# EAGLE board 2nx_interleaved_DANIEL_EDIT_dip2eagle (EAGLE 9.2.2)
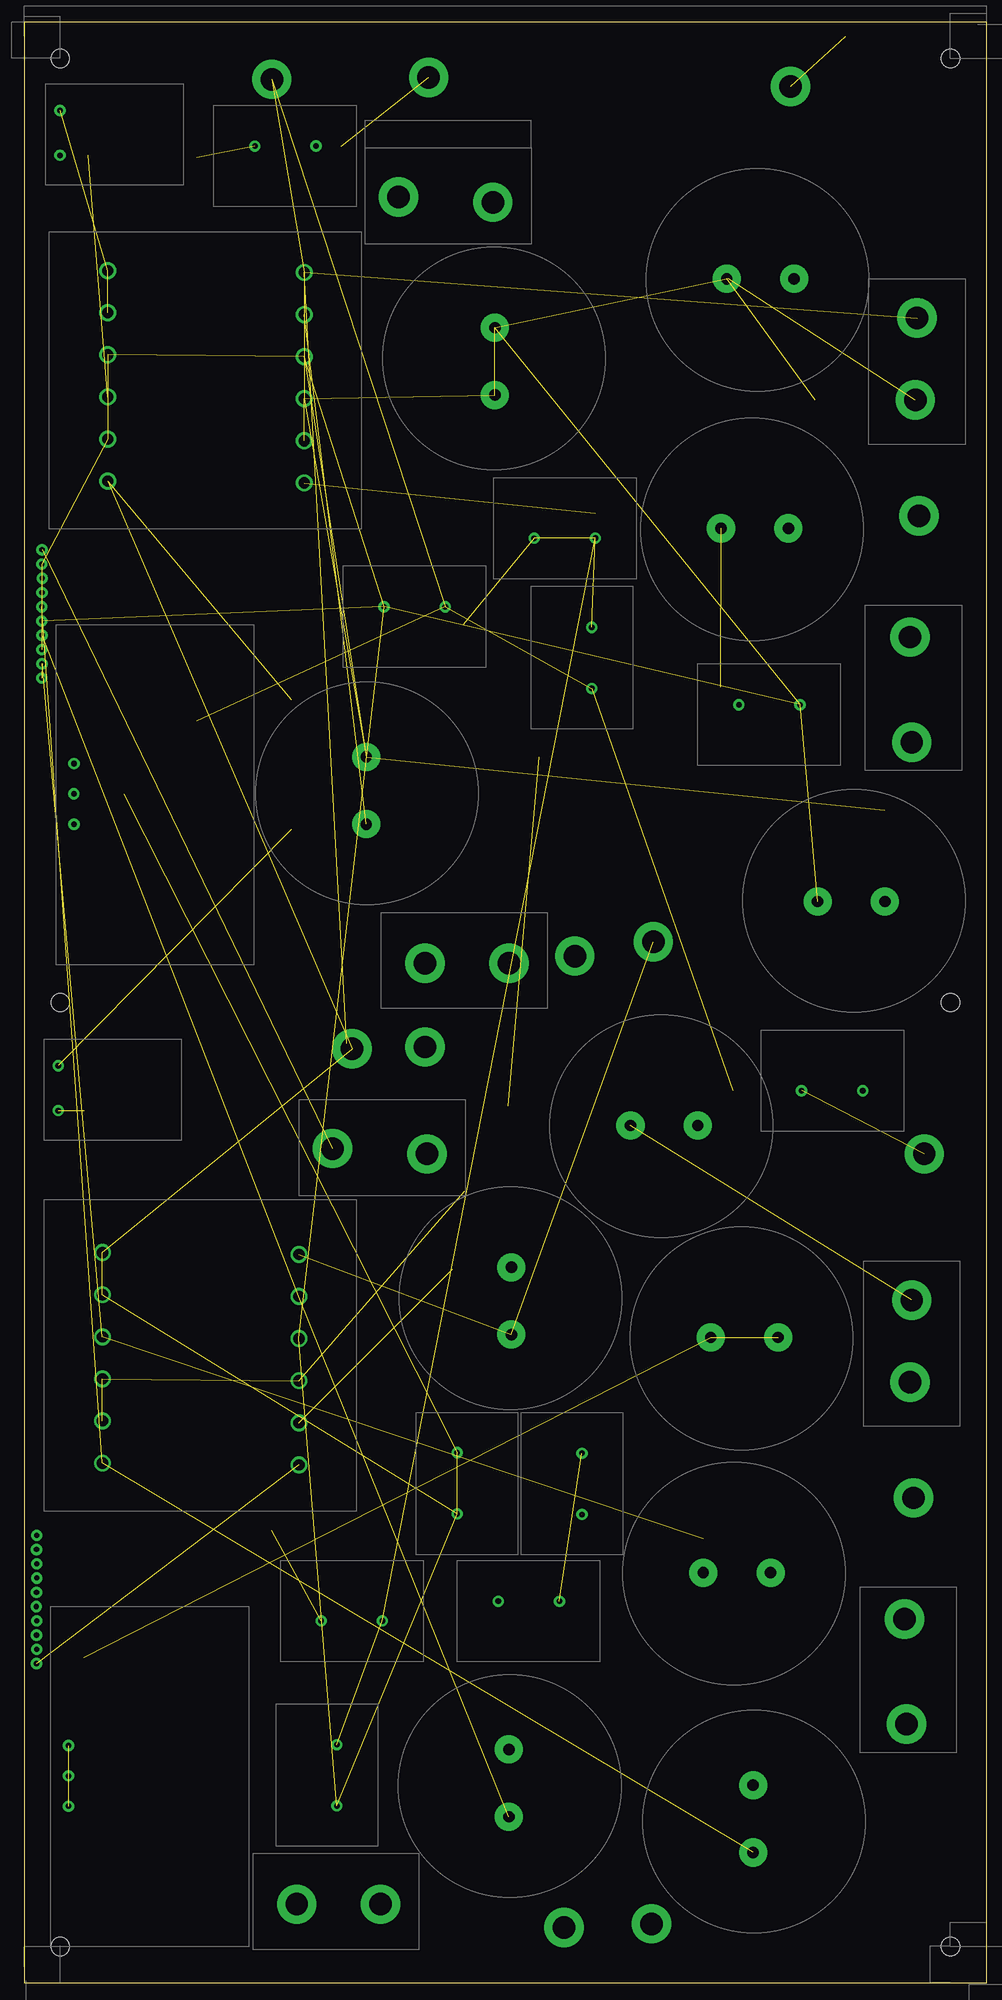
[diagram p0: board, top side]
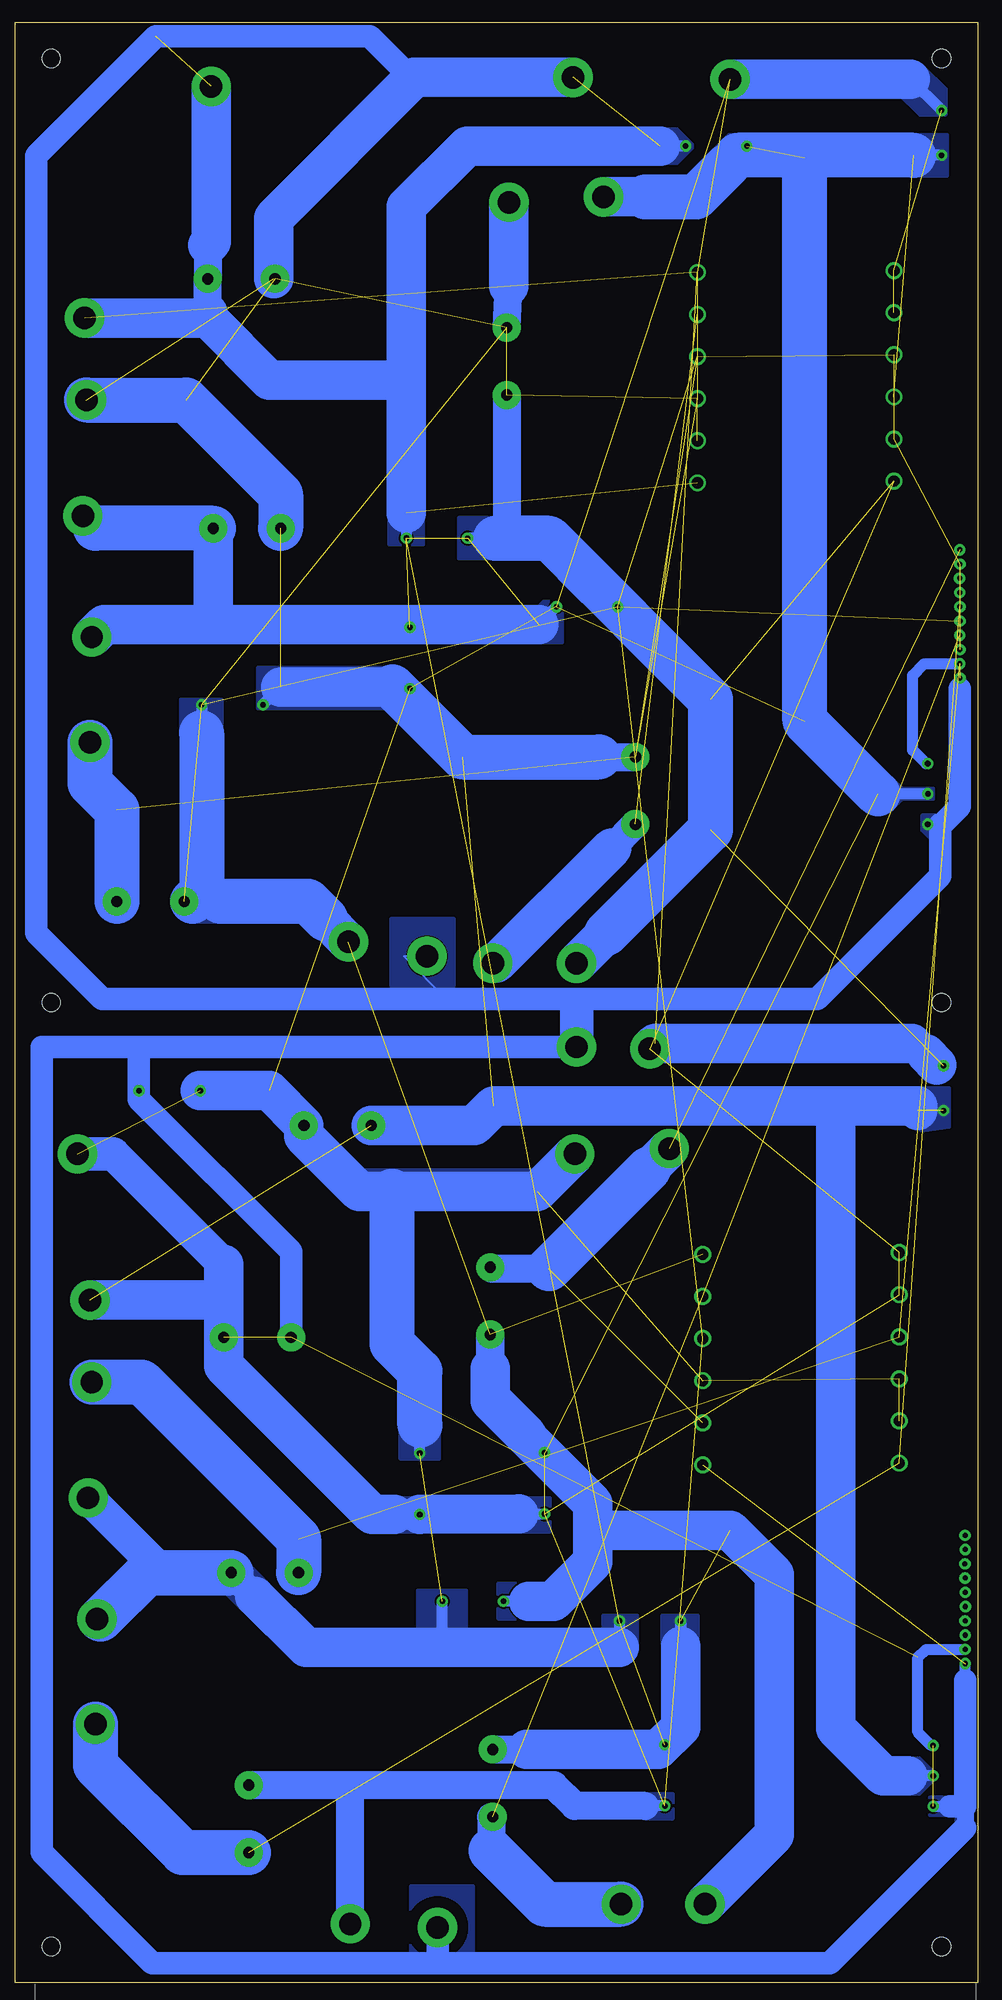
[diagram p1: board, bottom side, seen from below]

Size 171.45 x 349.25 mm. Coordinates in mm from the lower left corner, seen from the top.
Outline: 0,0 171.45,0 171.45,349.25 0,349.25 0,0
Copper layers (1*16): Top 0.035mm / dielectric 1.5mm / Bottom 0.035mm
Design rules "default *": minimum track width 10mil, minimum drill 0.61mm, track to track 8mil, track to pad 8mil, pad to pad 8mil, via to via 8mil, smd to smd 8mil, copper to edge 40mil, drill to drill 8mil, minimum pad ring 0mil, minimum via ring 8mil, stop-mask expansion 4mil, vias tented up to drill 20mil, thermal gap 10mil
Net classes: 0 Default: width 0.3 mm, drill 0.3 mm, clearance 0.203 mm
Holes 3.3 mm at 165,342.8 6.45,342.8 165,6.45 6.45,6.45 165,174.62 6.45,174.62

## Footprints (pad centres in the part's own frame; a part is rotated, then mirrored left to right if it is on the bottom)
PAD = drill 4 pad 7: 1 0,0
PAD1 = drill 1 pad 2: 1 0,0
PAD_PAD2 = drill 2 pad 3: 1 0,0
PAD_PAD14 = drill 2 pad 5: 1 0,0
PAD_PAD29 = drill 0.9 pad 2: 1 0,0
P116 = drill 1 pad 2: 1 0,0.005; 1_1 -5.398,-0.005; 1_2 5.398,-0.005
P117 = drill 1 pad 2: 1 0,0.005; 1_1 -5.398,-0.005; 1_2 5.398,-0.005
P118 = drill 1 pad 2: 1 5.45,2.765; 1_1 -5.45,2.763
P119 = drill 1 pad 2: 1 5.45,2.765; 1_1 -5.45,2.763

## Placement (x,y rotation side)
PAD1  [PAD]  72.07,339.41 270 bottom
PAD2  [PAD1]  101.76,257.33 180 top
PAD3  [PAD1]  90.86,257.33 180 top
PAD4  [PAD_PAD2]  14.92,305 0 bottom
PAD5  [PAD1]  6.42,325.54 90 top
PAD6  [PAD_PAD2]  14.92,297.5 0 bottom
PAD7  [PAD1]  6.42,333.54 90 top
PAD8  [PAD_PAD2]  14.92,290 0 bottom
PAD9  [PAD1]  101.12,241.46 270 top
PAD10  [PAD_PAD2]  14.92,282.5 0 bottom
PAD11  [PAD1]  101.13,230.56 270 top
PAD12  [PAD_PAD2]  14.92,275 0 bottom
PAD13  [PAD1]  127.32,227.65 0 top
PAD14  [PAD_PAD2]  14.92,267.5 0 bottom
PAD15  [PAD1]  138.22,227.65 0 top
PAD16  [PAD_PAD2]  49.92,304.68 0 bottom
PAD17  [PAD_PAD2]  49.92,297.18 0 bottom
PAD18  [PAD1]  64.14,245.11 0 top
PAD19  [PAD_PAD2]  49.92,289.68 0 bottom
PAD20  [PAD1]  75.03,245.11 0 top
PAD21  [PAD_PAD2]  49.92,282.18 0 bottom
PAD22  [PAD1]  63.82,64.45 180 top
PAD23  [PAD_PAD2]  49.92,274.68 0 bottom
PAD24  [PAD1]  55.72,42.39 270 top
PAD25  [PAD_PAD2]  49.92,267.18 0 bottom
PAD26  [PAD1]  6.11,155.36 90 top
PAD27  [PAD_PAD14]  83.87,282.84 180 bottom
PAD28  [PAD1]  77.15,83.5 90 top
PAD29  [PAD_PAD14]  83.87,294.84 180 bottom
PAD30  [PAD1]  77.15,94.4 90 top
PAD31  [PAD_PAD14]  60.96,218.38 0 bottom
PAD32  [PAD1]  6.11,163.36 90 top
PAD33  [PAD_PAD14]  60.96,206.38 0 bottom
PAD34  [PAD1]  52.92,64.45 180 top
PAD35  [PAD_PAD14]  141.34,192.61 270 bottom
PAD36  [PAD1]  55.72,31.49 270 top
PAD37  [PAD_PAD14]  153.34,192.61 270 bottom
PAD38  [PAD1]  84.45,67.94 0 top
PAD39  [PAD_PAD14]  136.14,259.08 90 bottom
PAD40  [PAD1]  95.36,67.95 0 top
PAD41  [PAD_PAD14]  124.14,259.08 90 bottom
PAD42  [PAD1]  149.38,158.91 180 top
PAD43  [PAD_PAD14]  137.16,303.53 90 bottom
PAD44  [PAD1]  138.48,158.91 180 top
PAD45  [PAD_PAD14]  125.16,303.53 90 bottom
PAD46  [PAD]  136.53,337.82 270 bottom
PAD47  [PAD]  159.07,296.55 270 bottom
PAD48  [PAD]  158.75,281.94 270 bottom
PAD49  [PAD]  98.11,182.88 270 bottom
PAD50  [PAD]  159.38,261.3 270 bottom
PAD51  [PAD_PAD29]  3.17,232.41 180 bottom
PAD52  [PAD]  157.8,239.71 270 bottom
PAD53  [PAD]  158.12,220.98 270 bottom
PAD54  [PAD]  71.44,181.61 270 bottom
PAD55  [PAD]  86.36,181.61 270 bottom
PAD56  [PAD]  112.08,185.42 270 bottom
PAD57  [PAD]  83.5,317.18 270 bottom
PAD58  [PAD]  66.67,318.13 270 bottom
PAD59  [PAD_PAD29]  3.21,247.65 180 bottom
PAD60  [PAD_PAD29]  3.23,250.19 180 bottom
PAD61  [PAD_PAD29]  3.17,252.73 180 bottom
PAD62  [PAD_PAD29]  3.21,255.27 180 bottom
PAD63  [PAD_PAD29]  3.17,237.49 180 bottom
PAD64  [PAD_PAD29]  3.21,240.03 180 bottom
PAD65  [PAD_PAD29]  3.15,242.57 180 bottom
PAD66  [PAD_PAD29]  3.17,245.11 180 bottom
PAD67  [PAD]  44.13,339.09 270 bottom
PAD68  [PAD_PAD29]  3.21,234.95 180 bottom
PAD69  [PAD]  58.42,166.37 270 bottom
PAD70  [PAD]  71.44,166.69 270 bottom
PAD71  [PAD_PAD2]  13.97,130.06 0 bottom
PAD72  [PAD_PAD2]  13.97,122.56 0 bottom
PAD73  [PAD_PAD2]  13.97,115.06 0 bottom
PAD74  [PAD_PAD2]  13.97,107.56 0 bottom
PAD75  [PAD_PAD2]  13.97,100.06 0 bottom
PAD76  [PAD_PAD2]  13.97,92.56 0 bottom
PAD77  [PAD_PAD2]  48.97,129.74 0 bottom
PAD78  [PAD_PAD2]  48.97,122.24 0 bottom
PAD79  [PAD_PAD2]  48.97,114.74 0 bottom
PAD80  [PAD_PAD2]  48.97,107.24 0 bottom
PAD81  [PAD_PAD2]  48.97,99.74 0 bottom
PAD82  [PAD_PAD2]  48.97,92.24 0 bottom
PAD83  [PAD_PAD14]  86.81,115.44 180 bottom
PAD84  [PAD_PAD14]  86.81,127.44 180 bottom
PAD85  [PAD_PAD14]  86.36,41.53 0 bottom
PAD86  [PAD_PAD14]  86.36,29.53 0 bottom
PAD87  [PAD_PAD14]  129.86,35.18 0 bottom
PAD88  [PAD_PAD14]  129.86,23.18 0 bottom
PAD89  [PAD_PAD14]  132.97,73.03 90 bottom
PAD90  [PAD_PAD14]  120.97,73.03 90 bottom
PAD91  [PAD_PAD14]  134.3,114.94 90 bottom
PAD92  [PAD_PAD14]  122.3,114.94 90 bottom
PAD93  [PAD]  160.34,147.64 270 bottom
PAD94  [PAD]  158.12,121.6 270 bottom
PAD95  [PAD]  157.8,107 270 bottom
PAD96  [PAD]  158.43,86.36 270 bottom
PAD97  [PAD]  156.84,64.77 270 bottom
PAD98  [PAD]  157.16,46.04 270 bottom
PAD99  [PAD]  48.58,13.97 270 bottom
PAD100  [PAD]  63.5,13.97 270 bottom
PAD101  [PAD]  111.76,10.48 270 bottom
PAD102  [PAD]  71.75,147.64 270 bottom
PAD103  [PAD]  54.93,148.59 270 bottom
PAD104  [PAD]  96.2,9.84 270 bottom
PAD105  [PAD_PAD29]  2.25,72.07 180 bottom
PAD106  [PAD_PAD29]  2.28,74.61 180 bottom
PAD107  [PAD_PAD29]  2.22,77.15 180 bottom
PAD108  [PAD_PAD29]  2.25,79.69 180 bottom
PAD109  [PAD_PAD29]  2.22,61.91 180 bottom
PAD110  [PAD_PAD29]  2.25,64.45 180 bottom
PAD111  [PAD_PAD29]  2.19,66.99 180 bottom
PAD112  [PAD_PAD29]  2.22,69.53 180 bottom
PAD113  [PAD_PAD29]  2.22,56.83 180 bottom
PAD114  [PAD_PAD29]  2.25,59.37 180 bottom
PAD115  [PAD_PAD14]  120.02,152.72 90 bottom
PAD116  [PAD_PAD14]  108.02,152.72 90 bottom
U1  [P116]  8.88,211.77 90 top
U2  [P117]  7.93,36.83 90 top
U3  [P118]  46.57,324.42 0 top
U4  [P119]  96.61,88.85 270 top

## Library data of the parts
PAD1-PAD116 U1-U4 = common

## Nets
NET_2: PAD2.1 PAD9.1 PAD14.1 PAD32.1
NET_3: PAD1.1 PAD22.1 PAD24.1 PAD25.1 U3.1
NET_5: PAD3.1 PAD5.1 PAD10.1 PAD20.1 PAD28.1 PAD30.1 PAD36.1 U1.1 U3.1_1
NET_6: PAD62.1 PAD81.1
NET_8: PAD17.1 PAD33.1
NET_9: PAD4.1 PAD6.1 PAD7.1 PAD13.1 PAD16.1 PAD21.1 PAD26.1 PAD45.1 PAD94.1 U2.1
NET_10: PAD19.1 PAD31.1
NET_11: PAD15.1 PAD35.1
NET_12: PAD1.1 PAD21.1 PAD23.1 PAD27.1 PAD29.1 PAD46.1 PAD48.1 PAD70.1 PAD82.1 PAD91.1 U1.1_1 U2.1_1
NET_13: PAD16.1 PAD47.1
NET_15: PAD8.1 PAD12.1 PAD15.1 PAD17.1 PAD18.1 PAD19.1 PAD34.1 PAD61.1 PAD63.1 PAD77.1
NET_16: PAD14.1 PAD69.1 PAD71.1 PAD72.1 U4.1
NET_20: PAD18.1 PAD65.1 PAD79.1
NET_21: PAD64.1 PAD78.1
NET_22: PAD68.1 PAD73.1
NET_23: PAD66.1 PAD76.1
NET_24: PAD11.1 PAD20.1 PAD22.1 PAD67.1 PAD74.1 PAD75.1 PAD80.1 PAD93.1 U4.1_1
NET_25: PAD92.1 U2.1_1

## Tracks (layer width: path | path; a pad name or v marks a point on that pad's centre or on a via)
NET_2  (4 unrouted)
  Bottom 2: 64.14,245.11 67.67,248.65 | 90.86,257.33 85.86,257.33 90.86,257.33
  Bottom 5: 83.87,282.84 83.87,257.33
  Bottom 7: 66.13,186.91 71.44,181.61
  Bottom 8: 76.36,257.33 83.87,257.33 85.86,257.33 76.36,257.33 | 76.36,257.33 47.62,228.6 47.62,205.42 66.13,186.91 | 67.67,248.65 76.36,257.33
  pour Bottom (isolate 0.33, no thermals): 86.68,260.99 92.39,260.99 92.39,253.68 85.72,253.68 85.72,260.35 86.11,259.84 86.27,259.73 86.46,259.73 86.62,259.85 86.68,260.03
NET_3  (4 unrouted)
  Bottom 2: U3.1 56.52,327.19 | 101.76,261.83 101.76,257.33
  Bottom 5: 137.16,309.53 137.16,303.53 137.16,297.53
  Bottom 7: 56.52,327.19 90.96,327.19 101.76,316.39 101.76,285.53 | 101.76,285.53 101.76,261.83 | 136.53,337.82 136.53,310.17 137.16,309.53 | 159.07,296.55 137.16,296.55 | 137.16,296.55 137.16,297.53 | 137.16,296.55 126.14,285.53 101.76,285.53
  pour Bottom (isolate 0.33, no thermals): 50.8,327.53 50.8,326.84 51.66,325.98 53.47,324.17 55.56,324.17 55.56,330.2 53.47,330.2
  pour Bottom (isolate 0.33, no thermals): 98.74,261.3 98.74,256.22 104.14,256.22 104.78,256.22 104.78,261.3
NET_5  (7 unrouted)
  Bottom 0.3: 138.75,258.13 137.09,258.13 136.14,259.08 | 157.16,259.08 159.38,261.3
  Bottom 2: PAD20.1 78.22,241.93 | 44.65,323.65 42.76,325.54 U3.1_1 | U3.1_1 | U1.1 17.78,211.77 | PAD5.1 11.43,325.54
  Bottom 7: 78.22,241.93 136.15,241.93 | 136.15,241.93 155.58,241.93 157.8,239.71 | 136.15,241.93 136.14,259.08 | 66.67,318.13 59.17,318.13
  Bottom 8: 136.14,259.08 | 136.14,259.08 157.16,259.08 | 59.17,318.13 50.16,318.13 44.65,323.65 | 17.78,211.77 30.8,224.79 30.8,325.12 | 11.43,325.54 42.76,325.54
  pour Bottom (isolate 0.33, no thermals): 73.98,246.06 77.34,246.06 78.42,244.98 78.42,238.76 73.98,238.76 73.98,243.21
  pour Bottom (isolate 0.33, no thermals): 42.04,321 41.27,321.76 41.27,329.25 43.5,329.25 43.81,329.25 44.13,329.25 44.32,329.25 52.28,321.29
  pour Bottom (isolate 0.33, no thermals): 11.11,321.94 11.11,329.25 5.4,329.25 5.4,321.94
  pour Bottom (isolate 0.33, no thermals): 7.94,212.72 7.94,210.82 13.47,210.82 15.12,209.16 15.56,208.87 15.56,214.82 13.47,212.72
  pour Bottom (isolate 0.33, no thermals): 80.01,71.12 85.41,71.12 85.41,64.77 80.01,64.77
NET_6  (2 unrouted)
  Bottom 5: 76.37,127.15 86.51,127.15 86.81,127.44
  Bottom 7: 54.93,148.59 58.64,144.87
  Bottom 8: 58.64,144.87 76.37,127.15
NET_8  (1 unrouted)
  Bottom 5: PAD33.1 65.2,202.13
  Bottom 7: 65.2,202.13 85.72,181.61 86.36,181.61
NET_9  (10 unrouted)
  Bottom 2: U2.1 12.43,36.83 | PAD13.1 124.14,230.83 | PAD7.1 11.98,339.09
  Bottom 5: 67.46,218.38 60.96,218.38
  Bottom 7: 108.02,152.72 89.7,152.72 86.21,156.21 25.29,156.21 | 25.29,156.21 10.7,156.21 10.7,155.36 | 12.43,36.83 16.83,36.83 25.29,45.29 25.29,156.21 | 124.14,230.83 104.22,230.83 | 11.98,339.09 44.13,339.09
  Bottom 8: 158.75,281.94 140.97,281.94 124.14,265.11 124.14,259.08 | 104.22,230.83 91.76,218.38 67.46,218.38
  pour Bottom (isolate 0.33, no thermals): 10.46,159.38 5.08,159.38 5.08,152.4 10.03,151.76 10.83,152.56
  pour Bottom (isolate 0.33, no thermals): 7.62,37.33 7.62,36.33 10.29,33.66 12.06,33.66 12.06,40.01 10.29,40.01
  pour Bottom (isolate 0.33, no thermals): 104.46,234.31 128.27,234.31 128.27,227.01 104.46,227.01
  pour Bottom (isolate 0.33, no thermals): 5.71,332.74 10.35,332.74 14.16,336.55 9.53,341.18 5.71,337.37
NET_10  (2 unrouted)
  Bottom 8: 158.12,220.98 158.12,213.68 153.34,208.9 153.34,192.61
NET_11  (2 unrouted)
  Bottom 5: 83.87,294.84 83.5,302.19
  Bottom 7: 83.5,302.19 83.5,317.18
NET_12  (9 unrouted)
  Bottom 0.3: 125.16,303.53 125.41,303.53 | U1.1_1 6.67,206.38 6.35,206.38 | 3.17,232.41 3.17,230.5 | 98.11,182.88 102.23,182.88 94.61,175.26 | 71.44,173.24 73.46,175.26 | U2.1_1 | U2.1_1 2.22,31.43
  Bottom 2: 8.89,217.17 9.21,217.17 11.59,219.55 11.59,232.89 9.53,234.95 3.21,234.95 | 2.22,53.83 2.22,56.83 | U2.1_1 4.94,31.43 | U2.1_1 | 149.38,158.91 149.38,161.91
  Bottom 3: 2.22,31.43 2.22,27.62
  Bottom 4: 6.67,206.38 6.67,197.17 28.57,175.26 73.46,175.26 94.61,175.26 155.89,175.26 167.64,187.01 167.64,325.44 146.37,346.71 108.27,346.71 100.97,339.41 PAD1.1 | 3.17,230.5 3.17,209.55 6.35,206.38 | 2.22,27.62 26.35,3.49 96.2,3.49 | 96.2,3.49 147,3.49 166.69,23.18 166.69,166.69 149.38,166.69 | 149.38,166.69 PAD70.1 | 96.2,9.84 96.2,3.49 | 2.22,53.83 2.22,31.43 4.94,31.43 | 149.38,161.91 149.38,166.69 | 149.38,166.69 149.38,157.32 122.3,130.24 122.3,114.94
  Bottom 6: PAD70.1 71.44,173.24
  Bottom 7: 125.41,303.53 125.41,314.32 100.33,339.41 PAD1.1
  pour Bottom (no thermals): 93.34,189.55 104.46,189.55 104.46,176.85 93.34,176.85
  pour Bottom (isolate 2, no thermals): 89.85,17.14 100.97,17.14 100.97,4.45 89.85,4.45
  pour Bottom (isolate 0.33, no thermals): 7.67,207.96 9.84,207.96 9.84,205.24 8.51,203.9 8.23,204.04
  pour Bottom (isolate 0.33, no thermals): 0.64,27.94 0.64,31.11 3.81,31.11 3.81,27.94
  pour Bottom (isolate 0.33, no thermals): 5.4,33.02 8.57,33.02 8.57,29.84 5.4,29.84
NET_13  (2 unrouted)
  Bottom 0.3: 11.75,167.32 11.75,165.42 9.21,165.42 | 7.3,163.51 6.26,163.51 6.11,163.36
  Bottom 7: 58.42,166.37 57.47,167.32 11.75,167.32 | 9.21,165.42 7.3,163.51
NET_15  (10 unrouted)
  Bottom 2: 79.95,67.94 84.45,67.94 | 77.15,94.4 80.33,97.58 | PAD15.1 138.22,222.65 | 52.92,59.95 PAD34.1 52.92,59.95
  Bottom 5: 134.84,192.61 139.89,192.61 141.34,192.61 | 86.36,41.53 80.36,41.53 | 86.81,115.44 86.81,109.44 86.81,115.44
  Bottom 7: 68.58,80.61 68.58,85.41 86.81,103.63 86.81,109.44 86.81,104.06 80.33,97.58 | 68.58,80.61 68.58,74.93 75.56,67.94 79.95,67.94 | 48.58,13.97 36.2,26.35 36.2,72.71 44.1,80.61 68.58,80.61 | 112.08,185.42 116.2,189.55 | 80.36,41.53 56.9,41.53 52.92,45.51 52.92,59.95
  Bottom 8: 116.2,189.55 119.26,192.61 134.84,192.61 | 138.22,222.65 138.22,194.28 139.89,192.61
  pour Bottom (isolate 0.33, no thermals): 134.94,188.91 139.7,188.91 139.7,194.63 134.94,194.63
  pour Bottom (isolate 0.33, no thermals): 134.62,222.88 134.62,228.6 141.92,228.6 141.92,222.88
  pour Bottom (isolate 0.33, no thermals): 49.85,60.33 49.85,65.41 56.2,65.41 56.2,60.33
NET_16  (5 unrouted)
  Bottom 2: U4.1 103.88,83.4 | 81.76,83.5 77.15,83.5
  Bottom 6: 134.3,127.95 153.99,147.64 160.34,147.64
  Bottom 7: 134.3,114.94 | 134.3,114.94 134.3,121.6 | 134.3,121.6 134.3,127.95 | 158.12,121.6 134.3,121.6 | 103.88,83.4 107.84,83.4 134.3,109.86 134.3,114.94 | U4.1 81.76,83.5
  pour Bottom (isolate 0.33, no thermals): 80.38,86.36 76.2,86.36 76.2,80.33 81.53,80.33
  pour Bottom (isolate 0.33, no thermals): 99.69,86.36 102.87,86.36 102.87,80.33 99.69,80.33 99.69,81.6
NET_20  (3 unrouted)
  Bottom 2: 55.72,31.49 59.22,31.49
  Bottom 5: 59.22,31.49 71.81,31.49 75.5,35.18 111.76,35.18 | 111.76,35.18 129.86,35.18 | 111.76,10.48 111.76,35.18
  pour Bottom (isolate 0.33, no thermals): 59.31,33.66 54.29,33.66 54.29,29.21 59.22,29.21 58.73,30.45
NET_21  (2 unrouted)
  Bottom 0.3: 86.36,29.53 86.68,29.53
  Bottom 5: 86.68,29.53 86.68,23.5
  Bottom 8: 86.68,23.5 77.15,13.97 63.5,13.97
NET_22  (2 unrouted)
  Bottom 8: 157.8,107 148.91,107 120.97,79.06 120.97,73.03
NET_23  (2 unrouted)
  Bottom 8: 157.16,46.04 157.16,38.73 141.6,23.18 129.86,23.18
NET_24  (8 unrouted)
  Bottom 0.3: 156.84,64.77 156.21,64.77
  Bottom 2: U4.1_1 99.38,99.3 | PAD22.1 63.82,59.69 | 95.36,59.69 95.36,67.95 | 95.36,67.95
  Bottom 5: 128.72,68.78 132.97,73.03
  Bottom 6: 145.1,73.03 158.43,86.36
  Bottom 7: 71.75,147.64 78.42,140.97 104.29,140.97 110.17,140.97 120.02,150.81 120.02,152.72 126.2,158.91 138.48,158.91 | 63.82,59.69 95.36,59.69 119.63,59.69 128.72,68.78 | 132.97,73.03 | 132.97,73.03
  Bottom 8: 99.38,99.3 99.38,108.9 104.29,113.82 104.29,140.97 | 132.97,73.03 145.1,73.03 | 156.21,64.77 147.96,73.03 132.97,73.03 | 132.97,73.03 145.1,73.03 | 132.97,73.03 145.1,73.03
  pour Bottom (isolate 0.33, no thermals): 95.89,98.11 102.87,98.11 102.87,93.34 95.89,93.34 95.89,94.3
  pour Bottom (isolate 0.33, no thermals): 109.86,144.78 79.06,144.78 79.06,139.38 109.86,139.38
  pour Bottom (isolate 0.33, no thermals): 91.12,69.85 99.69,69.85 99.69,62.23 91.12,62.23 91.12,62.55
  pour Bottom (isolate 0.33, no thermals): 126.21,70.84 130.49,75.12 134.71,70.9 135.03,70.58 135.12,70.48 130.84,66.2 128.49,69.13
  pour Bottom (isolate 0.33, no thermals): 60.64,60.01 60.64,65.41 66.67,65.41 66.67,60.01
NET_25  (2 unrouted)
  Bottom 2: 7.94,42.23 8.26,42.23 10.64,44.61 10.64,57.94 9.21,59.37 2.25,59.37

## Text on the board
tDocu: + | Vin1 | LP | J1 | + | LP | CP1 | J2 | CP2 | + | + | D2 | CP3 | D3 | D4 | J4 | D5 | + | CP4 | SP | CP5 | + | J3 | VOP | + | Vin2 | LP' | D0 | + | J1' | CP' | CP'2 | + | J3' | + | LP' | CP1' | D2 | + | D4 | D3 | CP3' | J4' | + | D5 | CP4' | + | SP' | CP5' | + | J2' | VOP'